# Altium PCB ECGAquisitionBoard.PcbDoc
Units mm, origin at the board's own origin, x right, y up, seen from the top; angles counter-clockwise.
Board outline 150 x 100 mm, 2 copper layers (Top Layer, Bottom Layer); 54 components, 42 nets, 207 pads, 0 vias.
Unrouted connection lines stored in the file: 24.
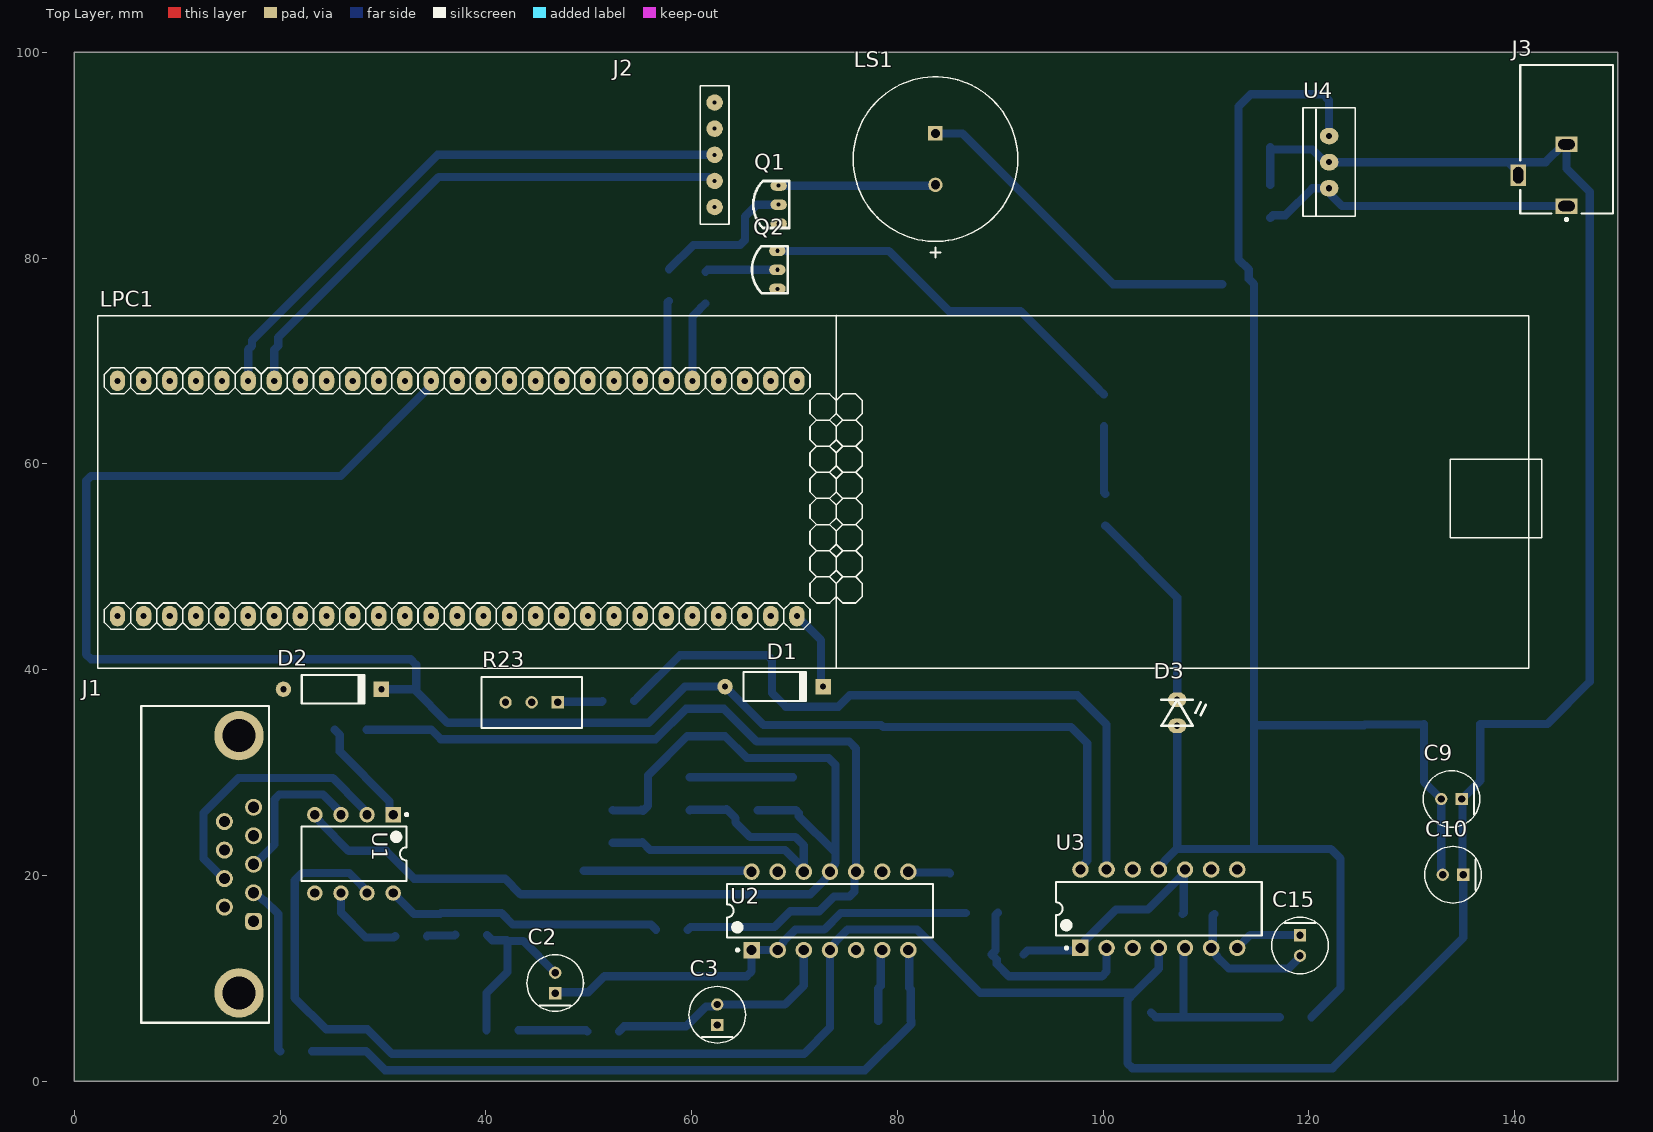
[diagram p0: Top Layer view]
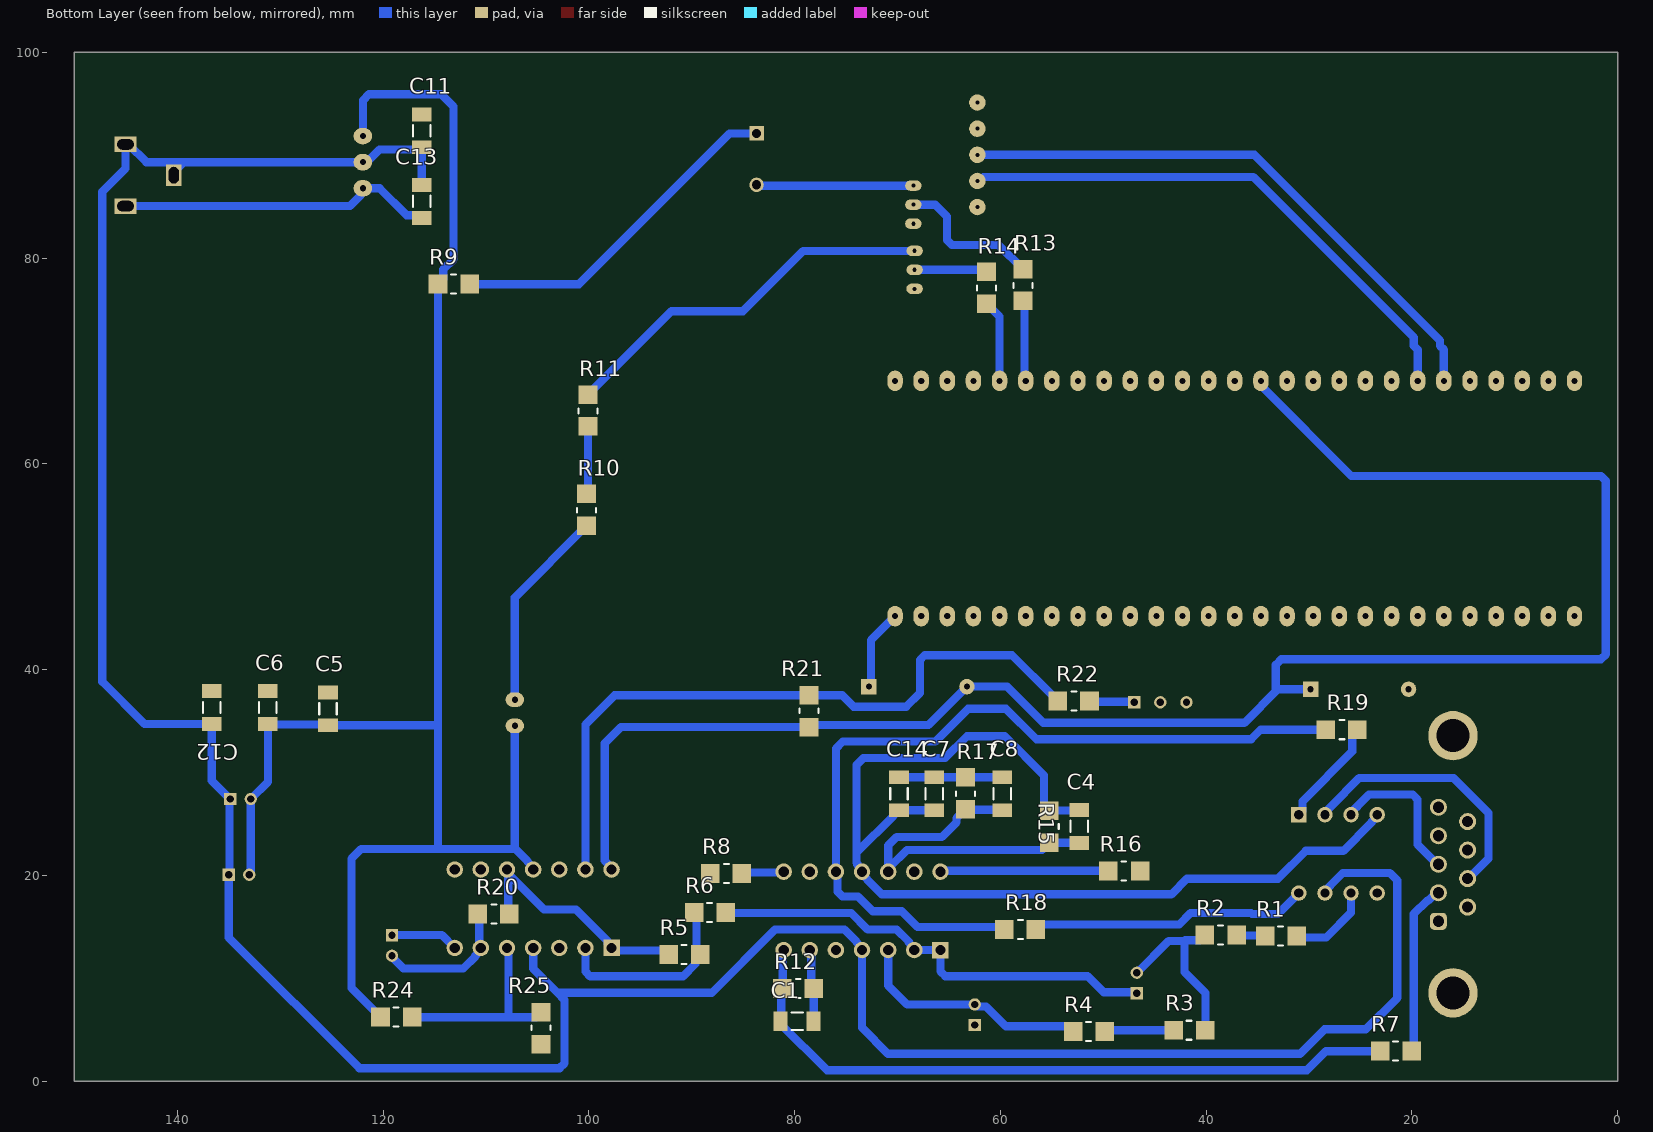
[diagram p1: Bottom Layer view, seen from below]
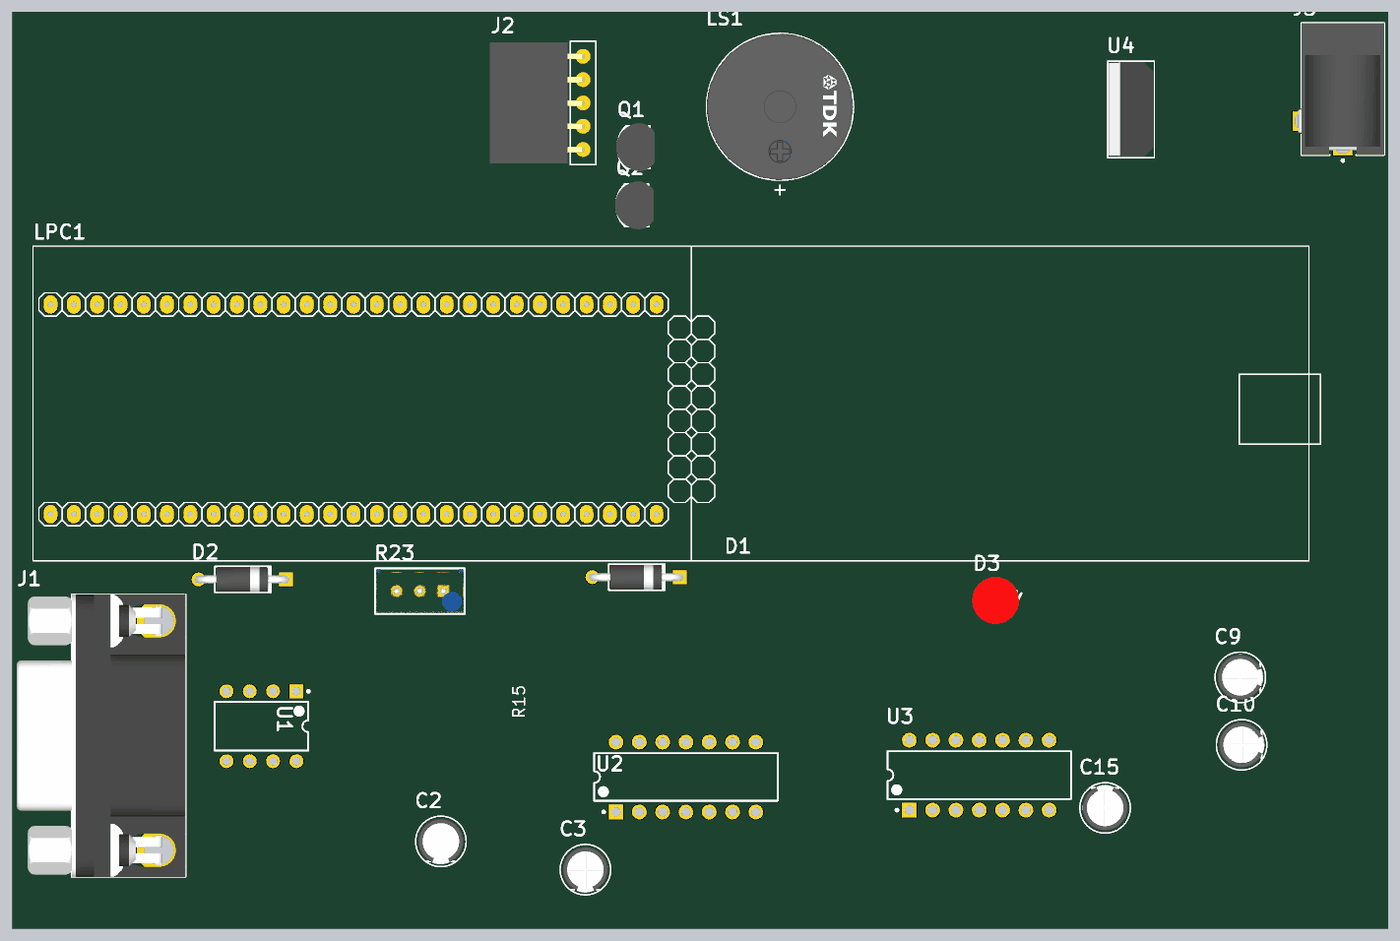
[diagram p2: 3D render of the assembled board from above, using the file's embedded part models]
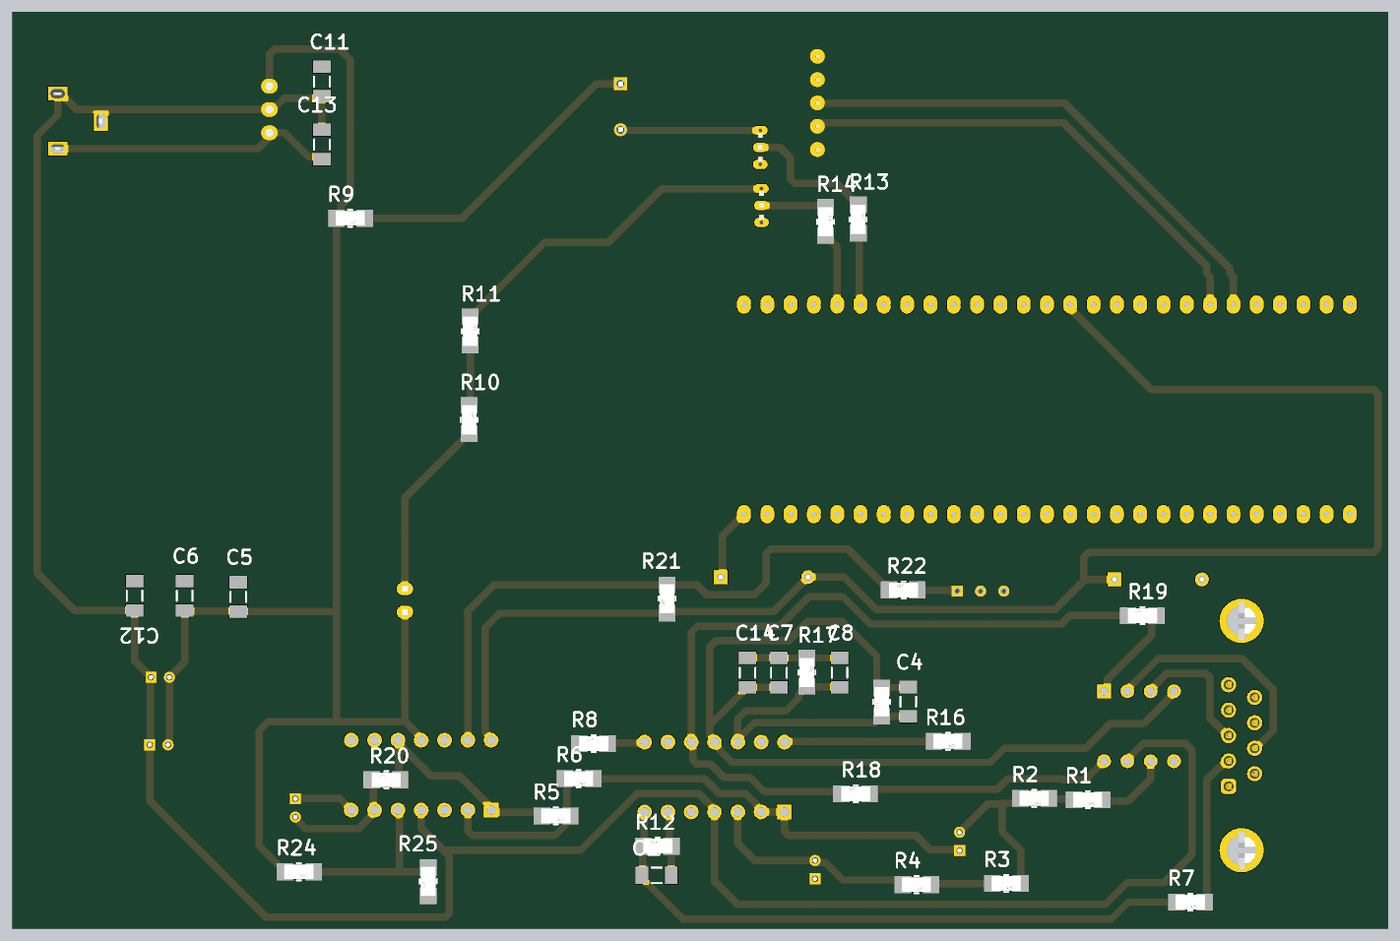
[diagram p3: 3D render of the assembled board from below, using the file's embedded part models]

## Layer stack, top to bottom
Top Solder: solder mask 0.0102, Solder Resist, Dk 3.5
Top Layer: signal copper 0.0356
Dielectric 1: dielectric 0.32, FR-4, Dk 4.8
Bottom Layer: signal copper 0.0356
Bottom Solder: solder mask 0.0102, Solder Resist, Dk 3.5

## Board outline
0,0 0,100 150,100 150,0

## Design rules (kind name [scope] priority, off if disabled: settings)
Clearance [All] p1: gap=0.8 ignorepadtopadclearanceinfootprint=FALSE
PolygonConnect [All] p1: connectstyle=Direct reliefconductorwidth=0.254 reliefentries=4 polygonreliefangle="90 Angle" airgapwidth=0.254
RoutingVias [All] p1: holewidth=0.711 width=1.27 viastyle="Through Hole" minholewidth=0.711 minwidth=1.27 maxholewidth=0.711 maxwidth=1.27
SolderMaskExpansion [All] p1: expansion=0.102 istentingtop=FALSE
Width [All] p1: maxlimit=0.8 minlimit=0.8 preferedwidth=0.8 minimp=50.000000 maximp=50.000000 favimp=50.000000
30 further rules are at their usual default settings.

## Components (designator, comment, footprint, x,y, rotation, side; value= is the part's Value field where it differs from the comment)
C1 "47p" "CAP SMD 1206" 79.756,5.842 r180 bottom value=330nF
C2 "1u" FP-RAD-TH-D_5_0_5-L_11_1-MFG 46.736,9.541 r90 top
C3 "1u" FP-RAD-TH-D_5_0_5-L_11_1-MFG 62.484,6.461 r90 top
C4 "10n" "CAP SMD 1206" 52.324,24.765 r90 bottom value=330nF
C5 "100n" "CAP SMD 1206" 125.349,36.195 r270 bottom value=330nF
C6 "10n" "CAP SMD 1206" 131.191,36.322 r270 bottom value=330nF
C7 "10n" "CAP SMD 1206" 66.421,27.94 r270 bottom value=330nF
C8 "10n" "CAP SMD 1206" 59.817,27.94 r270 bottom value=330nF
C9 "100u" FP-RAD-TH-D_5_0_5-L_11_1-MFG 133.858,27.432 r180 top
C10 "100u" FP-RAD-TH-D_5_0_5-L_11_1-MFG 134.001,20.066 r180 top
C11 "100n" "CAP SMD 1206" 116.241,92.377 r90 bottom value=330nF
C12 "10n" "CAP SMD 1206" 136.652,36.322 r90 bottom value=330nF
C13 "330n" "CAP SMD 1206" 116.241,85.519 r270 bottom value=330nF
C14 "100n" "CAP SMD 1206" 69.85,27.94 r270 bottom value=330nF
C15 "1u" FP-RAD-TH-D_5_0_5-L_11_1-MFG 119.126,13.192 r270 top
D1 "DIODO SCHOTTKY" DO-41 63.246,38.354 r0 top
D2 "DIODO SCHOTTKY" DO-41 20.32,38.1 r0 top
D3 "LED AXIAL" LED_AXIAL 107.188,34.544 r270 top
J1 "618009231121" 618009231121 12.7,21.082 r270 top
J2 "PPTC051LFBN-RC" "HEADER 5 F 90DEG" 62.23,95.123 r270 top
J3 "PJ-102BH" CUI-PJ-102BH_V 145.034,88.059 r90 top
LPC1 "LPCXPRESSO_LPC1769" LPCXPRESSO_LPC1769 103.886,62.357 r180 top
LS1 "SD1614T5-A1" FP-SD1614T5-A1-MFG 83.693,89.622 r270 top
Q1 "BC817-40" TO-92 68.453,83.947 r90 top
Q2 "BC817-40" TO-92 68.329,77.616 r90 top
R1 "1k" "RES SMD 1206" 32.766,14.097 r0 bottom
R2 "470" "RES SMD 1206" 38.608,14.224 r0 bottom
R3 "1k" "RES SMD 1206" 41.656,4.953 r0 bottom
R4 "470" "RES SMD 1206" 51.435,4.826 r0 bottom
R5 "10k" "RES SMD 1206" 90.742,12.318 r0 bottom
R6 "10k" "RES SMD 1206" 88.265,16.383 r0 bottom
R7 "100k" "RES SMD 1206" 21.59,2.921 r0 bottom
R8 "10k" "RES SMD 1206" 86.614,20.193 r180 bottom
R9 "100" "RES SMD 1206" 113.157,77.47 r0 bottom
R10 "100" "RES SMD 1206" 100.203,55.499 r270 bottom
R11 "100" "RES SMD 1206" 100.076,65.151 r270 bottom
R12 "390k" "RES SMD 1206" 79.629,9.017 r180 bottom
R13 "1k" "RES SMD 1206" 57.785,77.343 r270 bottom
R14 "2k2" "RES SMD 1206" 61.341,77.089 r270 bottom
R15 "100k" "RES SMD 1206" 55.245,24.765 r90 bottom
R16 "1k" "RES SMD 1206" 48.006,20.447 r0 bottom
R17 "100k" "RES SMD 1206" 63.373,27.94 r270 bottom
R18 "1k" "RES SMD 1206" 58.039,14.732 r180 bottom
R19 "1k" "RES SMD 1206" 26.797,34.163 r180 bottom
R20 "1M" "RES SMD 1206" 109.22,16.256 r180 bottom
R21 "100k" "RES SMD 1206" 78.614,36.005 r90 bottom
R22 "1k" "RES SMD 1206" 52.832,36.957 r180 bottom
R23 "3296W-1-103RLF" FP-3296W-MFG 44.45,36.825 r90 top
R24 "10k" "RES SMD 1206" 118.745,6.223 r0 bottom
R25 "470" "RES SMD 1206" 104.648,5.183 r90 bottom
U1 "INA114AP" P0008A 27.178,22.098 r270 top
U2 "TL084MJB" J0014A 73.442,16.558 r90 top
U3 "TL084MJB" J0014A 105.41,16.764 r90 top
U4 "LM7809" LM7809 121.956,86.789 r90 top

## Footprints (in the part's own frame and the unit in brackets; to place one, negate y for a bottom-side part, rotate by r counter-clockwise, add the part's x,y. Pads: shape width x height; smd on the part's side, far side on the other; paste and mask are expansions set on the pad)
618009231121 [mm] "9 pins, right angled, 8.08mm, with hex screw"
  rrect50% 1.65x1.65 hole 1.09: 1(5.54,4.72)
  round 1.65 hole 1.09: 2(2.77,4.72) 3(0,4.72) 4(-2.77,4.72) 5(-5.54,4.72) 6(4.155,1.88) 7(1.385,1.88) 8(-1.385,1.88) 9(-4.155,1.88)
  round 4.8 hole 3.2: M1(-12.5,3.3) M2(12.5,3.3)
  silkscreen extent -15.4,-6.2 15.4,6.2, body extent -15.4,-12.2 15.4,6.2, height 12.55
"CAP SMD 1206" [mm] "Chip Capacitor, Body 3.2x1.6mm, Height 1.9mm, IPC Low Density"
  rect 1.35x1.9 smd: 1(-1.6,0) 2(1.6,0)
  silkscreen extent -0.55,-0.85 0.55,0.85, body extent -1.7,-0.9 1.7,0.9, height 1.9
CUI-PJ-102BH_V [mm] "THD, 3-Leads, Body 14.4x9mm, Height 11mm"
  rect 1.5x2.1 hole 1 slot 1.6 at 90 deg: 1(-3,0) 2(3,0)
  rect 2.1x1.5 hole 1 slot 1.6 at 0 deg: 3(0,4.7)
  silkscreen extent -4.42,-4.5 10.7,4.5, body extent -3.7,-4.5 10.7,4.9, height 11
DO-41 [mm]
  round 1.5 hole 0.6: 1(0,0)
  rect 1.5x1.5 hole 0.6: 2(9.525,0)
  silkscreen extent 1.78,-1.4 7.98,1.4, body extent -0.43,-1.36 9.95,1.34, height 2.83
FP-3296W-MFG [mm]
  rect 1.2x1.2 hole 0.7 paste-2539.97 mask+0: 1(0.005,-2.54)
  round 1.2 hole 0.7 paste-2539.97 mask+0: 2(0.005,0) 3(0.005,2.54)
  silkscreen extent -2.48,-4.89 2.48,4.89, body extent -2.58,-4.99 2.58,4.99, height 0.25
FP-RAD-TH-D_5_0_5-L_11_1-MFG [mm]
  rect 1.2x1.2 hole 0.7 paste-2539.97 mask+0: 1(-1,0)
  round 1.2 hole 0.7 paste-2539.97 mask+0: 2(1,0)
  silkscreen extent -2.75,-2.75 2.75,2.75, body extent -2.85,-2.85 2.85,2.85, height 0.25
FP-SD1614T5-A1-MFG [mm]
  rect 1.4x1.4 hole 0.9 paste-2539.97 mask+0: 1(-2.5,0)
  round 1.4 hole 0.9 paste-2539.97 mask+0: 2(2.5,0)
  silkscreen extent -8,-8 9.57,8, body extent -8.1,-8.1 8.1,8.1, height 0.25
"HEADER 5 F 90DEG" [mm]
  round 1.6 hole 0.4 paste-2539.97 mask+0: 1(0,0) 2(2.54,0) 3(5.08,0) 4(7.62,0) 5(10.16,0)
  silkscreen extent -1.65,-1.4 11.81,1.4, body extent -1.5,-10.16 11.7,0.14, height 2.54
J0014A [mm] "DIP, 14-Leads, Body 19.95x7.2mm, Pitch 2.54mm"
  rect 1.6x1.6 hole 1: 1(-3.81,7.62)
  round 1.6 hole 1: 2(-3.81,5.08) 3(-3.81,2.54) 4(-3.81,0) 5(-3.81,-2.54) 6(-3.81,-5.08) 7(-3.81,-7.62) 8(3.81,-7.62) 9(3.81,-5.08) 10(3.81,-2.54) 11(3.81,0) 12(3.81,2.54) 13(3.81,5.08) 14(3.81,7.62)
  silkscreen extent -3.93,-10 2.6,10, body extent -3.96,-9.97 3.96,9.97, height 5.08
LED_AXIAL [mm]
  oval 1.4x1.8 hole 0.6: A(0,0) K(-2.54,0)
  silkscreen extent -2.54,-1.52 0,2.79, body extent -3.82,-2.55 1.28,2.55, height 10.6
LM7809 [mm]
  oval 1.6x1.8 hole 0.6 paste-2539.97 mask+0: 1(0,0) 2(2.54,0) 3(5.08,0)
  silkscreen extent -2.73,-2.54 7.81,2.54, body extent -2.6,-2.41 7.68,2.41, height 16.89
LPCXPRESSO_LPC1769 [mm]
  oval 1.5x2 hole 0.6: 1(33.655,-5.715) 2(36.195,-5.715) 3(38.735,-5.715) 4(41.275,-5.715) 5(43.815,-5.715) 6(46.355,-5.715) 7(48.895,-5.715) 8(51.435,-5.715) 9(53.975,-5.715) 10(56.515,-5.715) 11(59.055,-5.715) 12(61.595,-5.715) 13(64.135,-5.715) 14(66.675,-5.715) 15(69.215,-5.715) 16(71.755,-5.715) 17(74.295,-5.715) 18(76.835,-5.715) 19(79.375,-5.715) 20(81.915,-5.715) 21(84.455,-5.715) 22(86.995,-5.715) 23(89.535,-5.715) 24(92.075,-5.715) 25(94.615,-5.715) 26(97.155,-5.715) 27(99.695,-5.715) 28(33.655,17.145) 29(36.195,17.145) 30(38.735,17.145) 31(41.275,17.145) 32(43.815,17.145) 33(46.355,17.145) 34(48.895,17.145) 35(51.435,17.145) 36(53.975,17.145) 37(56.515,17.145) 38(59.055,17.145) 39(61.595,17.145) 40(64.135,17.145) 41(66.675,17.145) 42(69.215,17.145) 43(71.755,17.145) 44(74.295,17.145) 45(76.835,17.145) 46(79.375,17.145) 47(81.915,17.145) 48(84.455,17.145) 49(86.995,17.145) 50(89.535,17.145) 51(92.075,17.145) 52(94.615,17.145) 53(97.155,17.145) 54(99.695,17.145)
  silkscreen extent -38.73,-12.07 101.6,22.23
P0008A [mm] "DIP, 8-Leads, Body 10.15x6.6mm, Pitch 2.54mm"
  rect 1.5x1.5 hole 0.9: 1(-3.81,3.81)
  round 1.5 hole 0.9: 2(-3.81,1.27) 3(-3.81,-1.27) 4(-3.81,-3.81) 5(3.81,-3.81) 6(3.81,-1.27) 7(3.81,1.27) 8(3.81,3.81)
  silkscreen extent -3.93,-5.1 2.65,5.24, body extent -3.95,-5.07 3.95,5.07, height 5.08
"RES SMD 1206" [mm]
  rect 1.8x1.84 smd paste+0 mask+0: 1(-1.588,-0.001) 2(1.5,0)
  silkscreen extent -0.23,-0.92 0.23,0.92, body extent -1.6,-0.8 1.6,0.8, height 0.85
TO-92 [mm]
  oval 1x1.6 hole 0.4: 1(1.251,0.003) 2(3.1,0.002) 3(-0.6,-0.003)
  silkscreen extent -1.02,-1.02 3.56,2.47, body extent -1.34,-1.59 3.88,2.61, height 10

## Part data
C1 C4 C5 C6 C7 C8 C11 C12 C13 C14: library part "CAP SMD 1206", "CAP 330nF 50V ±10% 1206 (3216 Metric) Thickness 1.9mm SMD", Case-EIA=1206, Case-Metric=3216, Rated Voltage="50 V", TOLERANCE=Â±10%, Max Thickness="1.9 mm", Technology=SMT
C2 C3 C9 C10 C15: library part CMP-05427-000260-1, "Aluminum Electrolytic Capacitors (Radial Lead Type) AEC-Q200 Qualified 10uF ±20% 50V", Capacitance=10uF, Case/Package=Radial, Leakage Current=3uA, Max Operating Temperature=105°C, Min Operating Temperature=-55°C, Package Quantity=2000, Ripple Current=39mA, TOLERANCE=20%, Voltage Rating=50V, Construction=RADIAL, Contact Plating=Tin, Diameter=5mm, Height=11mm, Height - Seated (Max)=0.472inch, Lead Diameter=0.5mm, Lead Free="Lead Free", Lead Pitch=2.5mm, Lead/Base Style=Straight, Length=11mm, Life (Hours)=1000Hour, Mount="Through Hole", Packaging="Ammo Pack", Polarity=Polar, Radiation Hardening=No, RoHS Compliant=Yes, Series=NHG, Termination=Radial, Voltage Rating (DC)=50V
D1 D2: "Diodo Schottky"
D3: "Typical RED GaAs LED", LatestRevisionDate=08-Jul-2005, LatestRevisionNote="Mech Layer 1 removed.", PackageReference=LED-1, Published=8-Jun-2000, Publisher="Altium Limited"
J1: library part CMP-1502-00200-2, Contact Resistance=30mΩ, Current Rating=3A, Insulation Resistance=5GΩ, Max Operating Temperature=105°C, Min Operating Temperature=-55°C, Operating Supply Voltage=125V, Contact Material="Gold, Nickel", Contact Plating=Gold, Depth=18.5mm, Gender=Female, Height=12.7mm, Housing Material=Steel, Insulation Material=PBT, Length=30.8mm, Mount="Through Hole", NexarPartId=18818187, Number of Contacts=9, Number of Pins=9, Number of Rows=2, Orientation="Right Angle", Pitch=2.77mm, REACH SVHC=Unknown, RoHS=Compliant, Termination=SMD/SMT, Voltage Rating=125V, Width=12.5mm
J2: library part "HEADER 5 F 90DEG", "Description", Manufacturer_Name=Sullins, Copyright="Copyright (C) 2025 Ultra Librarian. All rights reserved.", Manufacturer_Part_Number=PPTC051LFBN-RC, RefDes=RefDes, Type=Type
J3: library part CMP-2000-06901-1, "Through Hole Right Angle DC Power Jack, 5 A, 2.5 mm Center Pin, 3 Position, -25 to 85 degC, RoHS, Bulk", Current Rating=5A, Flammability Rating=UL94V-0, Insulation Resistance=100MOhms, Manufacturer=CUIInc., Operating Temperature Range=-25Cto+85C, Package Description="3-Pin Through Hole Device, Body 14.4 x 9 mm, Height 11 mm", Voltage Rating=24V, Brand=CUI, Connector Type=DCPowerJack, Contact Gender=Male, Contact Material=Copper, Contact Plating=Nickel, Datasheet URL=http://www.cui.com/product/resource/pj-102bh.pdf, Datasheet Version="Rev. 1.02, 05/2016", Factory Pack Quantity=280, Housing Material=PolybutyleneTerephthalate(PBT), Inside Contact Diameter=2.5mm, Manufacturer URL=http://www.cui.com/, Mounting Angle=Right, Mounting Style=ThroughHole, Mounting Technology=ThroughHole, Outside Contact Diameter=6.5mm, Package Reference=PJ-102BH, Product=Jacks, Product Category=DCPowerConnectors, RoHS=True, Termination Style=ThroughHole
LPC1: "LPC1768, LPC1769, mbed-Enabled Development LPCXpressoâ„¢ LPC1700 ARMÂ® CortexÂ®-M3 MCU 32-Bit Embedded Evaluation Board", Package=None, Availability=Unavailable, Check_prices=https://www.snapeda.com/parts/LPCXPRESSO%20LPC1769/Embedded%20Artists/view-part/45270/?ref=eda, MF="Embedded Artists", MP="LPCXPRESSO LPC1769", Price=None, SnapEDA_Link=https://www.snapeda.com/parts/LPCXPRESSO%20LPC1769/Embedded%20Artists/view-part/45270/?ref=snap
LS1: library part CMP-08413-000005-1, "BUZZER MAGNETIC 5V 80DB 2048HZ 1", Frequency=2.048kHz, Max Operating Temperature=85°C, Min Operating Temperature=-40°C, Operating Supply Current=80mA, Voltage Rating=5V, Mount=Panel, Sensing Method=Magnetic, Termination="PC Pins"
Q1 Q2: library part NPN, "NPN General Purpose Amplifier", ComponentLink1Description="Manufacturer Link", ComponentLink1URL=http://www.fairchildsemi.com/, ComponentLink2Description="Discontinuation Notice", ComponentLink2URL=http://www.fairchildsemi.com/obsolete/obs.jsp, DatasheetVersion=1997, LatestRevisionDate=20-Nov-2009, LatestRevisionNote="IPC-7351 Footprint Added.", PackageDescription="3-Pin SOT-23 Package 0.95 mm Pitch, 2.3 mm Lead Span", PackageReference=SOT-23A, PackageVersion=Sep-1998, Published=8-Jun-2000, Publisher="Altium Limited"
R1 R2 R3 R4 R5 R6 R7 R8 R9 R10 R11 R12 R13 R14 R15 R16 R17 R18 R19 R20 R21 R22 R24 R25: library part "RES SMD 1206", "Resistencia", LatestRevisionDate=17-Jul-2002, LatestRevisionNote="Re-released for DXP Platform.", Published=8-Jun-2000, Publisher="Altium Limited"
R23: library part CMP-07234-000024-1, "TRIMMER 10K OHM 0.5W PC PIN TOP", Max Operating Temperature=125°C, Max Power Dissipation=500mW, Min Operating Temperature=-55°C, Package Quantity=1, Resistance=10kR, Temperature Coefficient=100ppm/°C, TOLERANCE=10%, Composition=Cermet, Contact Plating=Tin, Depth=4.83mm, Height=0.395inch, Length=9.53mm, Military Standard=Not, Mount="Through Hole", Number of Turns=25, Packaging="Tape and Reel", Power Rating=500mW, Radiation Hardening=No, REACH SVHC="No SVHC", Taper=Linear, Termination=Pin, Weight=0.03oz, Width=0.19inch
U1: library part CMP-0992-00143-2, "Precision Instrumentation Amplifier, -40 to 85 degC, 8-pin DIP (P8), Green (RoHS & no Sb/Br)", Input Bias Current (+/-)(Max)(nA)=5, Manufacturer="Texas Instruments", Quiescent Current (+/-)(Typ)(mA)=2.2, CMRR(Min)(dB)=106, Code_JEDEC=MS-001, ComponentLink1Description="Manufacturer URL", ComponentLink1URL=http://www.ti.com/, ComponentLink2Description=Datasheet, ComponentLink2URL=http://www.ti.com/general/docs/lit/getliterature.tsp?genericPartNumber=INA114&fileType=pdf, ComponentLink3Description="Package Specification", ComponentLink3URL=http://www.ti.com/litv/pdf/mpdi001b, DatasheetVersion=SBOS014, Eco-Plan="Green (RoHS & no Sb/Br)", Gain(V/V)="1 to 10000", Input Offset (+/-)(Max)(uV)=125, Input Offset Drift (+/-)(Max)(uV/Degrees Celsius)=1, Mounting Technology="Through Hole", Noise at 1kHz(Typ)(nV/rt(Hz))=11, Non-Linearity (+/-)(Max)(%)=0.004, Number of Channels=1, Output Offset (+/-)(Max)(uV)=500/G, Output Offset Drift (+/-)(Max)(uV/Degrees Celsius)=10/G, PackageDescription="8-Pin Plastic In-Line, Body 9.59 x 6.35 mm, Pitch 2.54 mm", PackageReference=P0008A, PackageVersion="4040082/E, 04/2010", PartNumber=INA114AP, SubFamily="Dual Supply", Vs(Max)(V)=36, Vs(Min)(V)=4.5
U2 U3: library part CMP-0017-00784-2, "High Speed JFET-Input Quad Operational Amplifier, -55 to 125 degC, 14-pin DIP (J14)", Manufacturer="Texas Instruments", Rating=Military, CMRR(Min)(dB)=80, ComponentLink1Description="Manufacturer URL", ComponentLink1URL=http://www.ti.com/, ComponentLink2Description=Datasheet, ComponentLink2URL=http://www.ti.com/lit/ds/symlink/tl084m.pdf, ComponentLink3Description="Package Specification", ComponentLink3URL=http://www.ti.com/litv/pdf/mcer002d, DatasheetVersion=SLOS081G, GBW(Typ)(MHz)=3, IIB(Max)(pA)=200, Iq per channel(Max)(mA)=2.8, Mounting Technology="Through Hole", Number of Channels=4, Offset Drift(Typ)(uV/C)=18, PackageDescription="14-Pin Ceramic, Glass In-Line, Row Spacing 7.62 mm, Pitch 2.54 mm", PackageReference=J0014A, PackageVersion="4040083/F, 03/2003", PartNumber=TL084MJB, Slew Rate(Typ)(V/us)=13, Sub Family="General Purpose Amplifier", Vio (25C)(Max)(mV)=9, Vn at 1kHz(Typ)(nV/rtHz)=18
U4: "No Description Available", Manufacturer_Name=onsemi, Manufacturer_Part_Number=MC7809CTG, Copyright="Copyright (C) 2025 Ultra Librarian. All rights reserved.", RefDes=RefDes, Type=Type

## Nets (pads, with @x,y where several pads share a name; then routed paths per layer and width w, separated by ;. In a path a pad name is that pad's centre, name@x,y a point inside that pad or via, vN(x,y) a via of type N, cw(c..) or ccw(c..) an arc to the next point about the centre after c; other vN are vias at no path point)
+3V3: D1.2 LPC1.28 | length 7.9
  Bottom Layer w0.8: LPC1.28 72.578,42.865 72.578,38.547 D1.2
+4V5: C4.2 C5.2 C6.2 C7.2 C9.2 C10.2 C14.2 D3.A R9.2 R15.2 R24.2 U1.4 U2.11 U3.11 U4.3 | length 267.5
  Bottom Layer w0.8: U1.4 23.368,25.719 23.958,25.129 23.958,25.1 26.666,22.393 30.312,22.393 33.02,19.685 41.859,19.685 43.383,18.161 71.523,18.161 72.902,19.54 72.902,19.612 73.442,20.152 73.442,20.585 73.914,21.057 73.914,21.169 73.982,21.237 73.982,22.276 73.982,30.748 73.315,31.415 65.359,31.415 63.246,33.528 59.563,33.528 55.765,29.73 55.765,26.765 55.265,26.265 R15.2 55.131,26.379 55.068,26.315 52.374,26.315 C4.2 ; C7.2 70.125,26.34 70.4,26.065 70.4,25.79 73.914,22.276 ; U3.11 105.41,20.79 105.95,21.33 105.95,21.402 107.122,22.574 ; D3.A 107.188,22.64 107.122,22.574 ; R24.2 120.245,6.243 123.063,9.061 123.063,21.629 122.118,22.574 114.62,22.574 ; U4.3 121.956,95.341 121.362,95.935 114.35,95.935 113.157,94.742 113.157,79.883 114.157,78.883 114.157,77.97 R9.2 114.657,34.544 ; C10.2 133.001,20.174 132.858,20.317 C9.2 131.191,29.099 C6.2 131.127,34.658 125.412,34.658 C5.2 114.708,34.595 114.657,34.544 ; 107.122,22.574 114.62,22.574 ; 114.62,22.574 114.657,22.611 114.657,34.544
-4V5: C7.1 C8.1 C9.1 C10.1 C11.1 C12.1 C13.1 C14.1 J3.2 J3.3 R17.1 U1.7 U2.4 U3.4 U4.2 | length 298.8
  Bottom Layer w0.8: U1.7 28.448,18.477 27.858,19.067 27.858,19.096 26.716,20.238 22.143,20.238 21.418,19.513 21.418,8.11 24.487,5.041 28.487,5.041 30.861,2.667 70.905,2.667 73.442,5.204 73.442,12.965 73.982,13.505 73.982,13.577 75.154,14.748 81.891,14.748 88.041,8.598 103.046,8.598 ; C8.1 59.823,29.534 66.415,29.534 C7.1 C14.1 ; U3.4 105.402,12.946 105.402,10.954 103.046,8.598 ; C13.1 C11.1 116.467,90.551 120.346,90.551 121.415,89.482 121.803,89.482 U4.2 139.364,89.329 ; J3.3 140.334,88.359 139.364,89.329 ; 103.046,8.598 102.362,7.914 102.362,1.739 102.831,1.27 122.301,1.27 135.001,13.97 C10.1 134.929,20.138 134.929,27.361 C9.1 136.652,29.226 C12.1 143.18,34.722 147.284,38.826 147.284,86.46 145.034,88.71 J3.2 144.734,91.059 143.004,89.329 139.364,89.329
GND: C3.1 C5.1 C6.1 C11.2 C12.2 D2.1 J2.2 LPC1.1 LPC1.54 Q1.3 Q2.3 R16.1 R23.2 R23.3 R25.1 U1.5 U2.5 U2.13
NetC1_1: C1.1 R7.2 R12.1 U2.7 | length 68.2
  Bottom Layer w0.8: R7.2 28.344,2.921 30.198,1.067 76.856,1.067 81.356,5.567 C1.1 81.286,5.912 81.286,8.946 R12.1 81.14,9.093 81.14,12.671 U2.7
NetC1_2: C1.2 R8.1 R12.2 U2.6 | length 7.2
  Bottom Layer w0.8: C1.2 78.142,5.856 78.142,9.004 R12.2 78.369,9.257 78.369,12.595 U2.6 U2.6@78.421,12.85
NetC2_1: C2.1 R6.1 U2.1 U2.2 | length 44.4
  Bottom Layer w0.8: C2.1 46.831,8.636 49.943,8.636 51.515,10.208 59.816,10.208 ; 59.896,10.208 65.353,10.208 65.822,10.677 U2.1 67.813,12.748 U2.2 68.362,12.965 68.902,13.505 68.902,13.577 70.074,14.748 72.891,14.748 74.491,16.348 R6.1@86.641,16.348
NetC2_2: C2.2 R2.2 R3.1 | length 17.7
  Bottom Layer w0.8: R3.1 40.068,8.583 42.1,10.615 42.1,13.64 ; R2.2 40.108,14.204 40.608,13.704 42.036,13.704 42.1,13.64 ; C2.2 43.637,13.64 42.1,13.64
NetC3_2: C3.2 R4.2 U2.3 | length 23.3
  Bottom Layer w0.8: R4.2 52.935,4.834 53.435,5.334 59.46,5.334 61.387,7.261 62.176,7.261 62.376,7.461 C3.2 69.056,7.461 70.902,9.307 U2.3
NetC4_1: C4.1 C8.2 R15.1 R17.2 U2.12 | length 35.1
  Bottom Layer w0.8: C4.1 52.33,23.171 55.123,23.171 55.186,23.235 R15.1 55.264,23.177 55.962,22.479 69.08,22.479 70.749,20.81 U2.12@70.749,20.521 ; C8.2 59.867,26.39 63.323,26.39 R17.2 63.393,26.44 64.271,25.562 64.271,25.168 65.69,23.749 70.073,23.749 70.902,22.92 70.902,20.81 U2.12
NetC13_2: C13.2 J3.1 U4.1 | length 31
  Bottom Layer w0.8: C13.2 116.499,84.177 117.705,84.177 120.317,86.789 U4.1 122.209,86.536 122.209,86.071 123.221,85.059 J3.1
NetC15_1: C15.1 U3.3 U3.7 | length 6.6
  Bottom Layer w0.8: U3.7 114.284,14.208 119.11,14.208 C15.1
NetC15_2: C15.2 R20.1 U3.6 | length 13.7
  Bottom Layer w0.8: R20.1 110.643,16.09 110.643,13.107 U3.6 110.49,12.738 111.03,12.198 111.03,12.126 112.202,10.954 118.032,10.954 118.795,11.718 118.795,11.753 119.126,12.084 C15.2
NetD1_1: D1.1 D2.2 LPC1.15 R21.1 U3.14 | length 176
  Bottom Layer w0.8: D2.2 33.02,38.1 ; LPC1.15 34.537,67.938 34.537,67.47 25.889,58.823 1.612,58.823 1.143,58.354 1.143,41.49 1.612,41.021 32.684,41.021 33.226,40.479 33.226,38.1 33.02,38.1 ; U3.14 97.79,20.79 98.456,21.457 98.456,32.84 96.88,34.417 R21.1 78.415,34.615 66.985,34.615 D1.1 59.335,38.354 55.817,34.836 36.284,34.836 33.02,38.1
NetD3_K: D3.K R10.2 | length 19.8
  Bottom Layer w0.8: R10.2 107.188,47.014 D3.K
NetJ1_2: J1.2 R7.1 | length 16.7
  Bottom Layer w0.8: J1.2 17.65,18.312 18.395,17.567 18.5,17.567 19.818,16.249 19.818,3.106 R7.1
NetJ1_3: J1.3 U1.3 | length 14.8
  Bottom Layer w0.8: J1.3 17.514,21.082 19.445,23.013 19.445,25.12 19.445,27.389 19.914,27.858 24.176,27.858 25.318,26.716 25.318,26.687 25.908,26.097 U1.3
NetJ1_7: J1.7 U1.2 | length 26.2
  Bottom Layer w0.8: J1.7 14.486,19.697 12.555,21.628 12.555,26.076 15.937,29.458 25.116,29.458 27.858,26.716 27.858,26.687 U1.2@28.637,25.908
NetJ2_3: J2.3 LPC1.22 | length 56.5
  Bottom Layer w0.8: LPC1.22 16.891,71.099 17.272,71.48 17.272,72.008 35.307,90.043 J2.3
NetJ2_4: J2.4 LPC1.21 | length 53.4
  Bottom Layer w0.8: LPC1.21 19.431,71.098 19.812,71.479 19.812,72.285 35.411,87.884 61.633,87.884 62.014,87.503 J2.4
NetLPC1_5: LPC1.5 R14.2 | length 8.1
  Bottom Layer w0.8: LPC1.5 60.071,74.319 60.821,75.069 60.821,75.089 61.321,75.589 R14.2
NetLPC1_6: LPC1.6 R13.2 | length 7.9
  Bottom Layer w0.8: LPC1.6 57.658,68.199 57.658,75.716 R13.2
NetLS1_1: LS1.1 R9.1 | length 33.9
  Bottom Layer w0.8: LS1.1 86.313,92.122 100.964,77.471 R9.1
NetLS1_2: LS1.2 Q1.2 | length 15.3
  Bottom Layer w0.8: Q1.2 83.618,87.047 LS1.2
NetQ1_1: Q1.1 R13.1 | length 14.6
  Bottom Layer w0.8: R13.1 57.806,78.931 60.155,81.28 64.718,81.28 65.186,81.749 65.186,84.051 66.333,85.198 Q1.1
NetQ2_1: Q2.1 R14.1 | length 7.1
  Bottom Layer w0.8: R14.1 61.532,78.867 Q2.1
NetQ2_2: Q2.2 R11.1 | length 37.6
  Bottom Layer w0.8: Q2.2 68.345,80.697 79.159,80.697 85.01,74.846 91.97,74.846 99.557,67.259 99.557,67.239 100.057,66.739 R11.1
NetR1_1: R1.1 U1.6 | length 8.2
  Bottom Layer w0.8: U1.6 25.908,16.383 28.32,13.971 31.051,13.971 R1.1
NetR1_2: R1.2 R2.1 | length 2.8
  Bottom Layer w0.8: R1.2 34.33,14.161 36.956,14.161 R2.1
NetR3_2: R3.2 R4.1 | length 6.7
  Bottom Layer w0.8: R3.2 49.721,4.953 R4.1
NetR5_1: R5.1 R6.2 U3.2 | length 19.1
  Bottom Layer w0.8: R6.2 89.535,16.153 89.535,12.7 R5.1 89.654,11.819 89.654,11.389 90.845,10.198 99.861,10.198 100.33,10.667 U3.2
NetR5_2: R5.2 R20.2 U3.1 U3.10 | length 24.2
  Bottom Layer w0.8: R5.2 92.624,12.7 U3.1@97.536,12.7 ; U3.1 U3.1@97.536,12.7 ; R20.2 107.835,16.371 107.835,20.459 U3.10 107.797,20.421 107.797,20.133 104.358,16.694 101.242,16.694 98.19,13.642 98.19,13.354 U3.1@97.536,12.7
NetR8_2: R8.2 U2.8 U2.9 | length 4.1
  Bottom Layer w0.8: U2.8 81.15,20.281 85.026,20.281 R8.2
NetR10_1: R10.1 R11.2 | length 6.6
  Bottom Layer w0.8: R11.2 100.076,57.215 R10.1
NetR16_2: R16.2 U2.14 | length 16.3
  Bottom Layer w0.8: R16.2 65.743,20.447 U2.14
NetR18_1: R18.1 R19.1 U2.10 | length 82.5
  Bottom Layer w0.8: R19.1 34.695,34.162 35.621,33.236 56.48,33.236 59.439,36.195 63.142,36.195 66.322,33.015 75.315,33.015 75.982,32.348 U2.10 75.829,20.215 75.829,18.417 75.36,17.948 73.828,17.948 72.39,16.51 69.573,16.51 68.049,14.986 59.882,14.986 R18.1
NetR18_2: R18.2 U1.8 | length 27.1
  Bottom Layer w0.8: U1.8 33.02,16.256 35.534,16.256 35.623,16.345 41.504,16.345 42.609,15.24 56.039,15.24 56.539,14.74 R18.2
NetR19_2: R19.2 U1.1 | length 10.6
  Bottom Layer w0.8: R19.2 25.797,33.663 25.797,32.043 30.638,27.202 30.638,26.258 U1.1
NetR21_2: R21.2 R22.1 U3.13 | length 67.4
  Bottom Layer w0.8: R22.1 54.42,36.976 54.92,37.476 54.94,37.476 58.866,41.402 67.349,41.402 67.818,40.933 67.818,37.731 69.145,36.404 74.259,36.404 75.359,37.505 R21.2 ; R21.2@78.634,37.505 97.496,37.505 100.33,34.671 U3.13
NetR22_2: R22.2 R23.1 | length 4.4
  Bottom Layer w0.8: R23.1 47.053,36.893 51.269,36.893 R22.2
NetR24_1: R24.1 R25.2 U3.5 | length 19.4
  Bottom Layer w0.8: R25.2 105.107,6.224 107.797,6.224 ; U3.5@107.797,12.801 107.797,6.224 ; U3.5@107.853,12.857 U3.5 ; R24.1 107.797,6.224
NetU3_8: U3.8 U3.9 U3.12
pads on no net: J1.1 J1.4 J1.5 J1.6 J1.8 J1.9 J1.M1 J1.M2 J2.1 J2.5 LPC1.2 LPC1.3 LPC1.4 LPC1.7 LPC1.8 LPC1.9 LPC1.10 LPC1.11 LPC1.12 LPC1.13 LPC1.14 LPC1.16 LPC1.17 LPC1.18 LPC1.19 LPC1.20 LPC1.23 LPC1.24 LPC1.25 LPC1.26 LPC1.27 LPC1.29 LPC1.30 LPC1.31 LPC1.32 LPC1.33 LPC1.34 LPC1.35 LPC1.36 LPC1.37 LPC1.38 LPC1.39 LPC1.40 LPC1.41 LPC1.42 LPC1.43 LPC1.44 LPC1.45 LPC1.46 LPC1.47 LPC1.48 LPC1.49 LPC1.50 LPC1.51 LPC1.52 LPC1.53

## Silkscreen, mask and mechanical layers (free items; w line width, h text height)
Mechanical 1:
  lines w0.254: 150,0 0,0 0,100 150,100

## Text inside footprints (layer, text, board x,y; h text height)
J1: Mechanical 2 "PCB Edge" at 5.15,20.682 h1.02 r270
LPC1: Top 3D Body "LPC-Link   side" at 120.396,57.912 h1.78 r180; Top 3D Body "LPC target side" at 58.166,57.277 h1.78 r180; Top 3D Body "TM" at 110.236,56.642 h1.02 r180; Top 3D Body "3.3V" at 77.597,46.863 h1.78 r180; Top 3D Body "SWDIO/TMS" at 77.597,49.403 h1.78 r180; Top 3D Body "SWCLK/TCLK" at 77.597,51.943 h1.78 r180; Top 3D Body "SWO/TDO" at 77.597,54.483 h1.78 r180; Top 3D Body "NC/TDI" at 77.597,57.023 h1.78 r180; Top 3D Body "RESET" at 77.597,59.563 h1.78 r180; Top 3D Body "EXT-5V" at 77.597,62.103 h1.78 r180; Top 3D Body "GND" at 77.597,64.643 h1.78 r180; Top 3D Body "USB" at 139.446,57.277 h1.78 r180
U4: Top 3D Body "TAB" at 120.496,88.853 h0.64 r90